# Altium PCB PCB Band Pass.PcbDoc
Units mm, origin at the board's own origin, x right, y up, seen from the top; angles counter-clockwise.
Board outline 60 x 40 mm, 2 copper layers (Top Layer, Bottom Layer); 53 components, 38 nets, 154 pads, 61 vias.
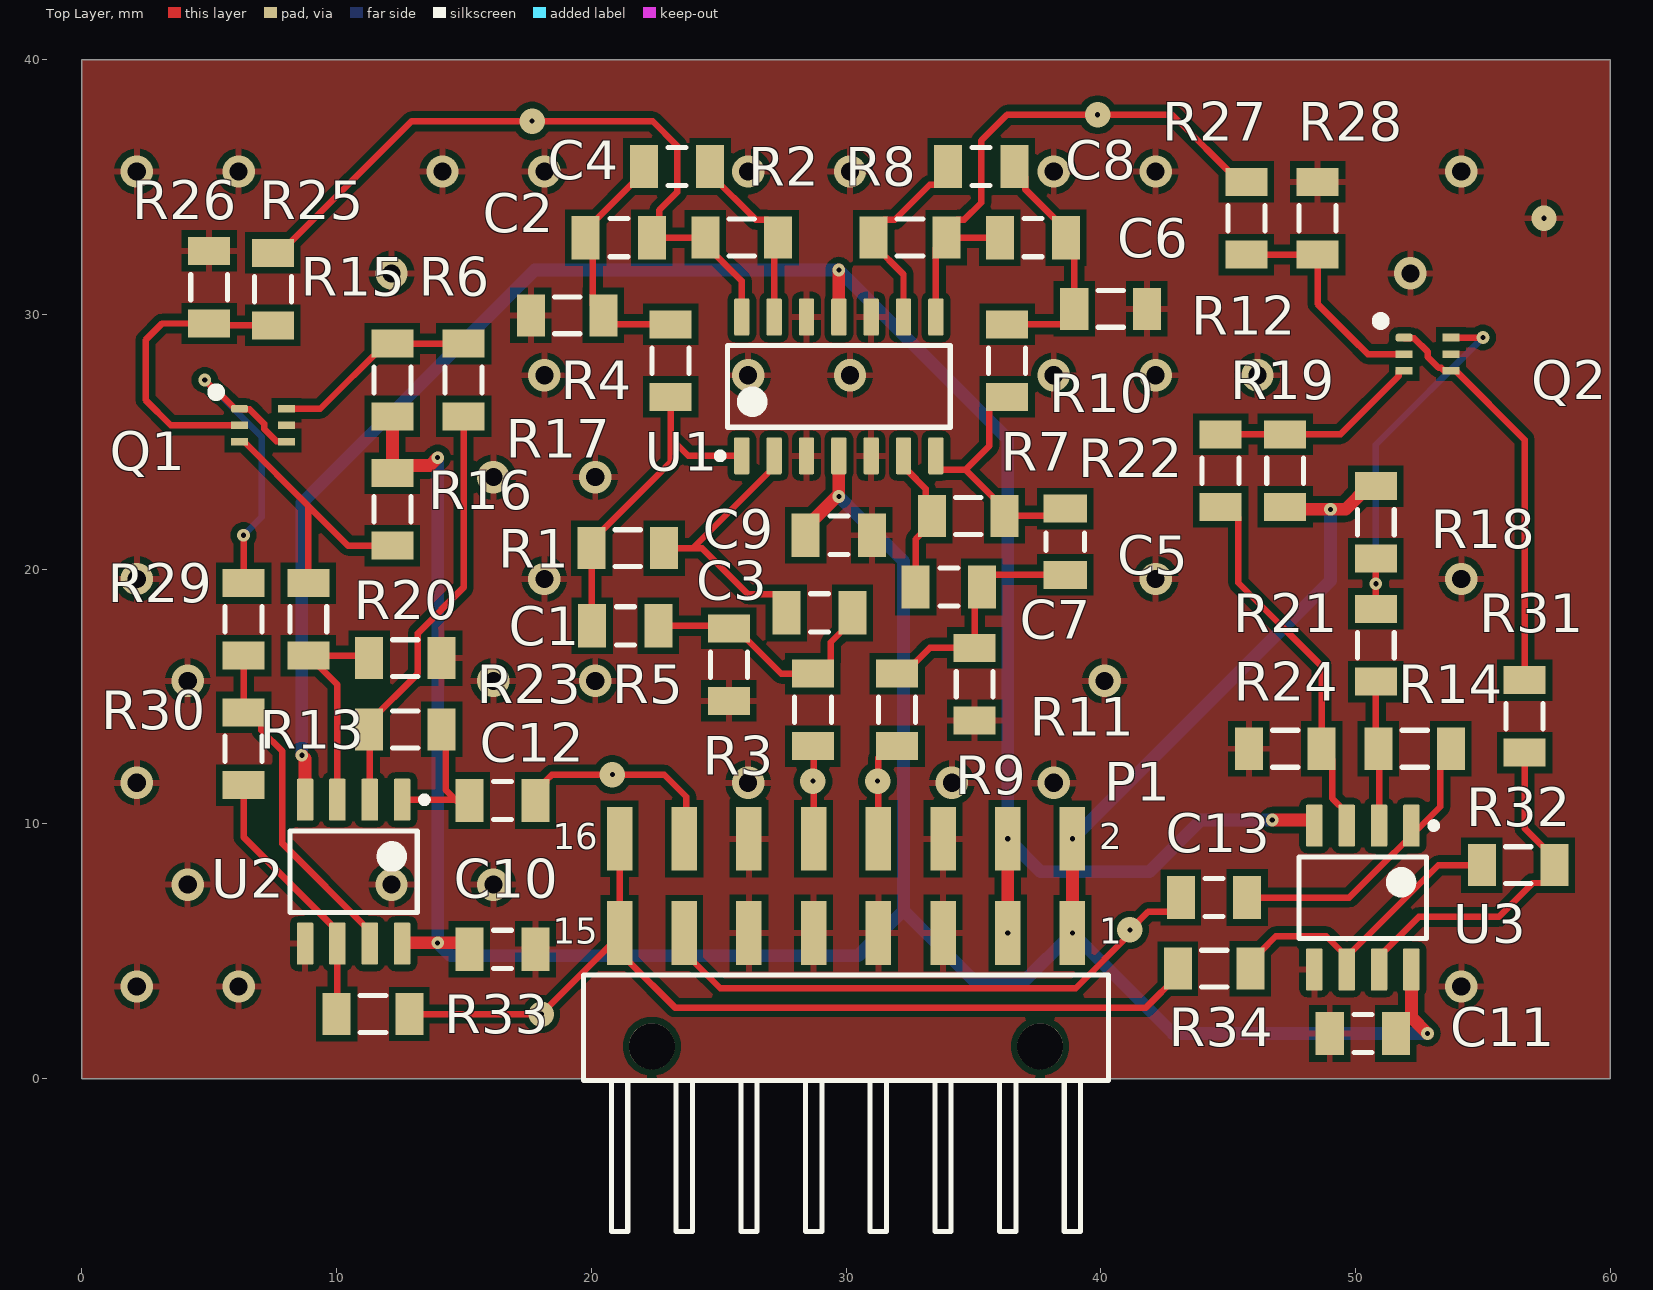
[diagram p0: Top Layer view]
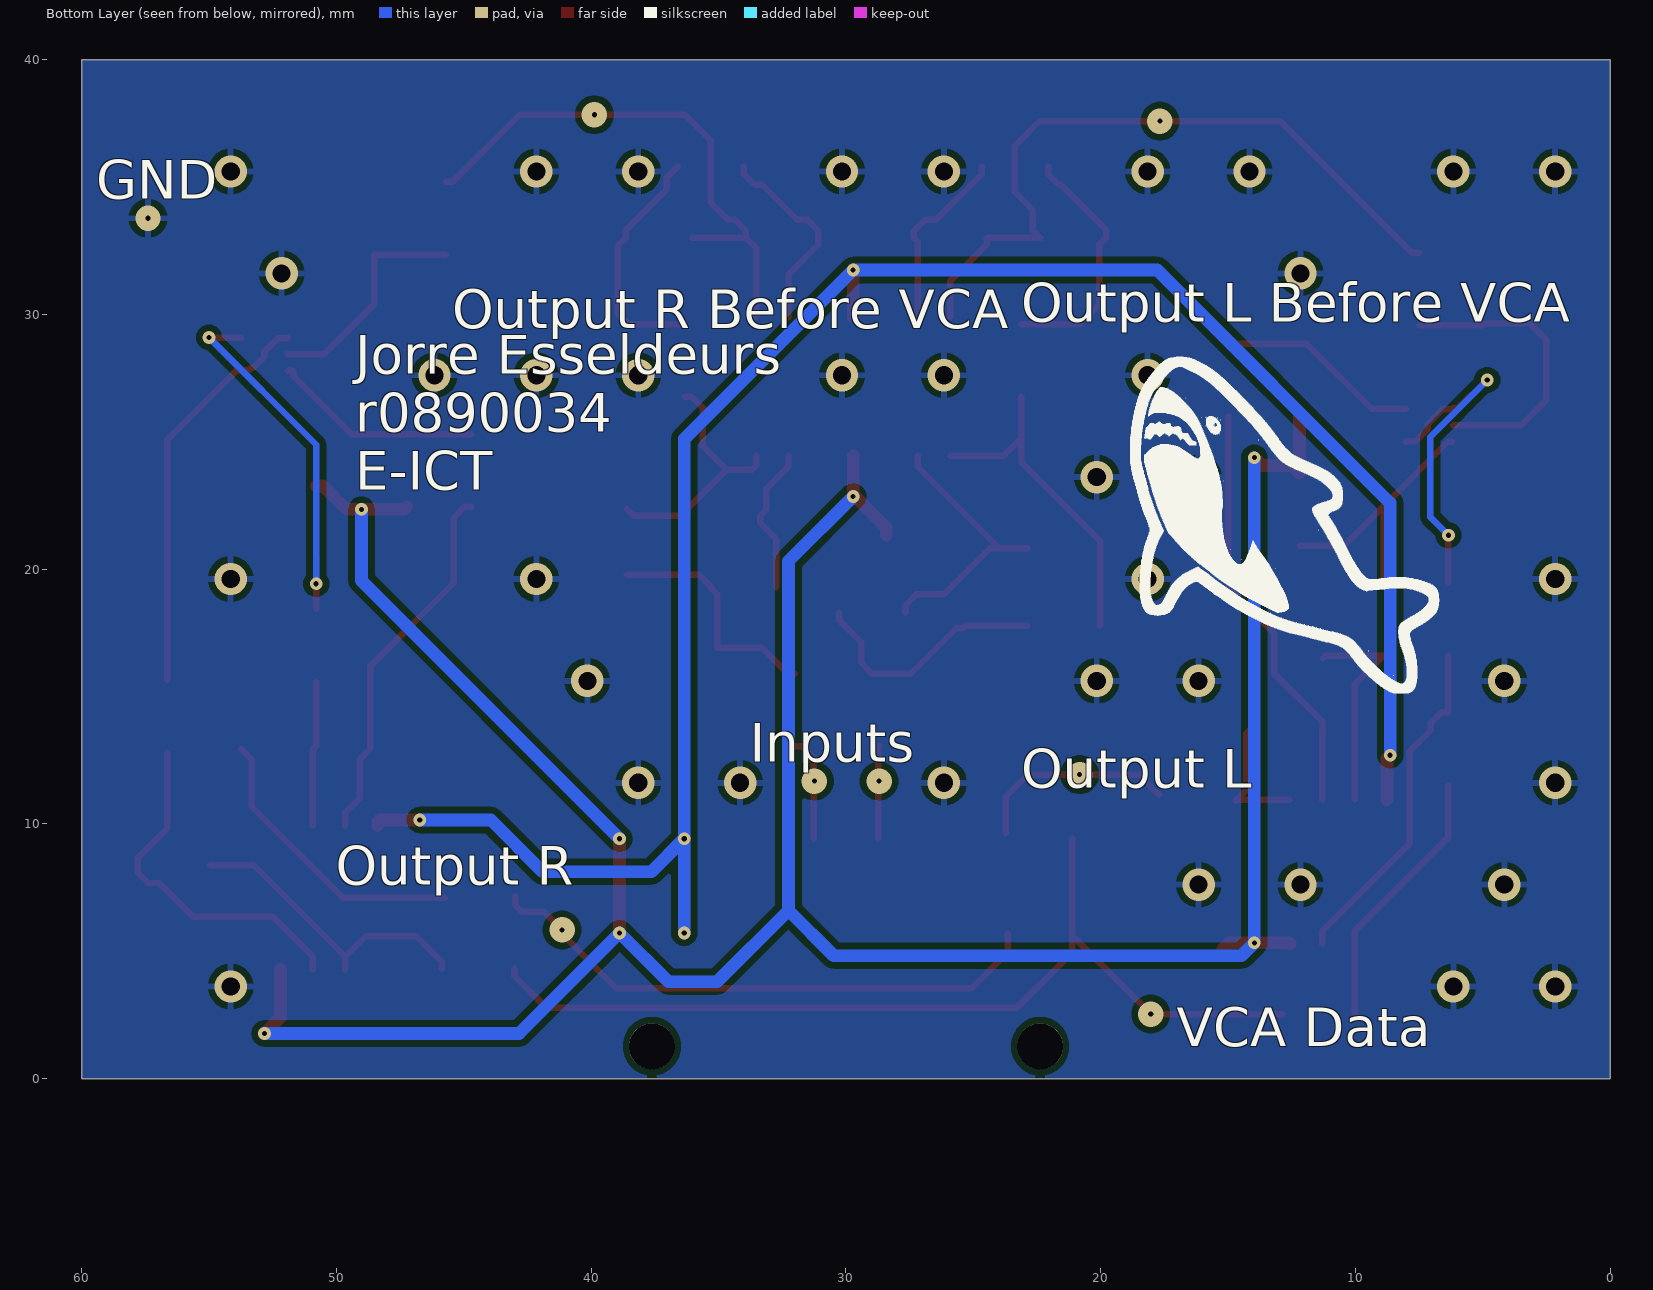
[diagram p1: Bottom Layer view, seen from below]

## Layer stack, top to bottom
Top Solder: solder mask 0.0102, Solder Resist, Dk 3.5
Top Layer: signal copper 0.0356
Dielectric 1: dielectric 0.32, FR-4, Dk 4.8
Bottom Layer: signal copper 0.0356
Bottom Solder: solder mask 0.0102, Solder Resist, Dk 3.5

## Board outline
0,0 0,40 60,40 60,0

## Design rules (kind name [scope] priority, off if disabled: settings)
Clearance [All] p1: gap=0.254 ignorepadtopadclearanceinfootprint=FALSE except(0: Arc-Hole Track-Hole SMDPad-Hole THPad-Hole Via-Hole Fill-Hole Poly-Hole Region-Hole Text-Hole)
PolygonConnect [All] p1: connectstyle=Relief reliefconductorwidth=0.254 reliefentries=4 polygonreliefangle="90 Angle" airgapwidth=0.254
RoutingVias [All] p1: holewidth=0.711 width=1.27 viastyle="Through Hole" minholewidth=0.711 minwidth=1.27 maxholewidth=0.711 maxwidth=1.27
SolderMaskExpansion [All] p1: expansion=0.102 istentingtop=FALSE
Width [All] p1: maxlimit=10 minlimit=0.254 preferedwidth=0.254 minimp=50.000000 maximp=50.000000 favimp=50.000000
30 further rules are at their usual default settings.

## Classes and differential pairs
component class SS1: C12 C13 Q1 Q2 R13 R14 R15 R16 R17 R18 R19 R20 R21 R22 R23 R24 R25 R26 R27 R28 R29 R30 R31 R32 R33 R34 U2 U3
component class "Schematic Band Pass": C1 C2 C3 C4 C5 C6 C7 C8 C9 C10 C11 P1 R1 R2 R3 R4 R5 R6 R7 R8 R9 R10 R11 R12 U1

## Components (designator, comment, footprint, x,y, rotation, side; value= is the part's Value field where it differs from the comment)
C1 "1206GC102KAT1A" AVX-1206-2_L 21.336,17.78 r180 top
C2 "1206GC102KAT1A" AVX-1206-2_L 21.082,33.02 r0 top
C3 "1206GC102KAT1A" AVX-1206-2_L 28.956,18.288 r180 top
C4 "1206GC102KAT1A" AVX-1206-2_L 23.368,35.814 r0 top
C5 "1206GC102KAT1A" AVX-1206-2_L 38.608,21.082 r90 top
C6 "1206GC102KAT1A" AVX-1206-2_L 37.338,33.02 r180 top
C7 "1206GC102KAT1A" AVX-1206-2_L 34.036,19.304 r180 top
C8 "1206GC102KAT1A" AVX-1206-2_L 35.306,35.814 r180 top
C9 "1206GC102KAT1A" AVX-1206-2_L 29.718,21.336 r180 top
C10 "1206GC102KAT1A" AVX-1206-2_L 16.51,5.08 r180 top
C11 "1206GC102KAT1A" AVX-1206-2_L 50.292,1.778 r0 top
C12 "1206GC102KAT1A" AVX-1206-2_L 16.51,10.922 r0 top
C13 "1206GC102KAT1A" AVX-1206-2_L 44.45,7.112 r180 top
P1 "610116249121" 610116249121 30,2 r0 top
Q1 "NSVT65011MW6T1G" NSVT65011MW6T1G 7.112,25.654 r0 top
Q2 "NSVT65011MW6T1G" NSVT65011MW6T1G 52.832,28.448 r0 top
R1 "ERJ-8GEY0R00V" RESC3216X70X50NL05T20 21.435,20.828 r180 top
R2 "ERJ-8GEY0R00V" RESC3216X70X50NL05T20 25.908,33.02 r180 top
R3 "ERJ-8GEY0R00V" RESC3216X70X50NL05T20 28.702,14.478 r90 top
R4 "ERJ-8GEY0R00V" RESC3216X70X50NL05T20 23.114,28.194 r90 top
R5 "ERJ-8GEY0R00V" RESC3216X70X50NL05T20 25.4,16.256 r90 top
R6 "ERJ-8GEY0R00V" RESC3216X70X50NL05T20 19.05,29.972 r0 top
R7 "ERJ-8GEY0R00V" RESC3216X70X50NL05T20 34.798,22.098 r0 top
R8 "ERJ-8GEY0R00V" RESC3216X70X50NL05T20 32.512,33.02 r0 top
R9 "ERJ-8GEY0R00V" RESC3216X70X50NL05T20 32.004,14.478 r90 top
R10 "ERJ-8GEY0R00V" RESC3216X70X50NL05T20 36.322,28.194 r90 top
R11 "ERJ-8GEY0R00V" RESC3216X70X50NL05T20 35.052,15.494 r90 top
R12 "ERJ-8GEY0R00V" RESC3216X70X50NL05T20 40.386,30.226 r180 top
R13 "ERJ-8GEY0R00V" RESC3216X70X50NL05T20 12.7,13.716 r0 top
R14 "ERJ-8GEY0R00V" RESC3216X70X50NL05T20 52.324,12.954 r0 top
R15 "ERJ-8GEY0R00V" RESC3216X70X50NL05T20 12.192,27.432 r270 top
R16 "ERJ-8GEY0R00V" RESC3216X70X50NL05T20 12.192,22.352 r90 top
R17 "ERJ-8GEY0R00V" RESC3216X70X50NL05T20 14.986,27.432 r270 top
R18 "ERJ-8GEY0R00V" RESC3216X70X50NL05T20 50.8,21.844 r90 top
R19 "ERJ-8GEY0R00V" RESC3216X70X50NL05T20 47.244,23.876 r270 top
R20 "ERJ-8GEY0R00V" RESC3216X70X50NL05T20 8.89,18.034 r270 top
R21 "ERJ-8GEY0R00V" RESC3216X70X50NL05T20 50.8,17.018 r270 top
R22 "ERJ-8GEY0R00V" RESC3216X70X50NL05T20 44.704,23.876 r270 top
R23 "ERJ-8GEY0R00V" RESC3216X70X50NL05T20 12.7,16.51 r180 top
R24 "ERJ-8GEY0R00V" RESC3216X70X50NL05T20 47.244,12.954 r0 top
R25 "ERJ-8GEY0R00V" RESC3216X70X50NL05T20 7.5,31 r90 top
R26 "ERJ-8GEY0R00V" RESC3216X70X50NL05T20 5,31.075 r270 top
R27 "ERJ-8GEY0R00V" RESC3216X70X50NL05T20 45.72,33.782 r90 top
R28 "ERJ-8GEY0R00V" RESC3216X70X50NL05T20 48.514,33.782 r270 top
R29 "ERJ-8GEY0R00V" RESC3216X70X50NL05T20 6.35,18.034 r90 top
R30 "ERJ-8GEY0R00V" RESC3216X70X50NL05T20 6.35,12.954 r90 top
R31 "ERJ-8GEY0R00V" RESC3216X70X50NL05T20 56.642,14.224 r90 top
R32 "ERJ-8GEY0R00V" RESC3216X70X50NL05T20 56.388,8.382 r0 top
R33 "ERJ-8GEY0R00V" RESC3216X70X50NL05T20 11.43,2.54 r180 top
R34 "ERJ-8GEY0R00V" RESC3216X70X50NL05T20 44.45,4.318 r0 top
U1 "TL074CDR" D0014A_N 29.718,27.178 r90 top
U2 "TL072CDR" D0008A_M 10.668,8.128 r270 top
U3 "TL072CDR" D0008A_M 50.292,7.112 r270 top

## Footprints (in the part's own frame and the unit in brackets; to place one, negate y for a bottom-side part, rotate by r counter-clockwise, add the part's x,y. Pads: shape width x height; smd on the part's side, far side on the other; paste and mask are expansions set on the pad)
610116249121 [mm] "Pin Header, pitch 2.54 mm, SMD, Angled, dual row, 16p"
  rect 1x2.5 smd: 1(8.89,3.72) 2(8.89,7.42) 3(6.35,3.72) 4(6.35,7.42) 5(3.81,3.72) 6(3.81,7.42) 7(1.27,3.72) 8(1.27,7.42) 9(-1.27,3.72) 10(-1.27,7.42) 11(-3.81,3.72) 12(-3.81,7.42) 13(-6.35,3.72) 14(-6.35,7.42) 15(-8.89,3.72) 16(-8.89,7.42)
  round 1.8 hole 1.8 unplated: MH1(7.62,-0.73) MH2(-7.62,-0.73)
  silkscreen extent -10.31,-8 10.31,2.07, body extent -10.16,-8 10.16,8.16, height 5.1
AVX-1206-2_L [mm] "SMD, 2-Leads, Body 3.4x1.8mm, IPC High Density"
  rect 1.1x1.7 smd: 1(-1.3,0) 2(1.3,0)
  silkscreen extent -0.35,-0.75 0.35,0.75, body extent -1.7,-0.9 1.7,0.9, height 1.52
D0008A_M [mm] "SOIC, 8-Leads, Body 5x4mm, Pitch 1.27mm, IPC Low Density"
  rrect15% 1.65x0.65 smd: 1(-2.825,1.905) 2(-2.825,0.635) 3(-2.825,-0.635) 4(-2.825,-1.905) 5(2.825,-1.905) 6(2.825,-0.635) 7(2.825,0.635) 8(2.825,1.905)
  silkscreen extent -2.95,-2.5 1.6,2.91, body extent -3,-2.45 3,2.45, height 1.63
D0014A_N [mm] "SOIC, 14-Leads, Body 8.75x4mm, Pitch 1.27mm, IPC Medium Density"
  rrect17% 1.45x0.6 smd: 1(-2.725,3.81) 2(-2.725,2.54) 3(-2.725,1.27) 4(-2.725,0) 5(-2.725,-1.27) 6(-2.725,-2.54) 7(-2.725,-3.81) 8(2.725,-3.81) 9(2.725,-2.54) 10(2.725,-1.27) 11(2.725,0) 12(2.725,1.27) 13(2.725,2.54) 14(2.725,3.81)
  silkscreen extent -2.85,-4.38 1.6,4.78, body extent -3.02,-4.32 3.02,4.32, height 1.59
NSVT65011MW6T1G [mm]
  rrect50% 0.66x0.3 smd: 1(-0.92,0.65)
  rect 0.66x0.3 smd: 2(-0.92,0) 3(-0.92,-0.65) 4(0.92,-0.65) 5(0.92,0) 6(0.92,0.65)
  silkscreen extent -1.94,1.2 -1.74,1.4, body extent -1.05,-1 1.05,1, height 1
RESC3216X70X50NL05T20 [mm] "Chip Resistor, 2-Leads, Body 3.20x1.60mm, IPC Medium Density"
  rect 1.1x1.65 smd: 1(-1.425,0) 2(1.425,0)
  silkscreen extent -0.5,-0.72 0.5,0.72, body extent -1.63,-0.82 1.62,0.82, height 0.7

## Part data
C1 C2 C3 C4 C5 C6 C7 C8 C9 C10 C11 C12 C13: library part CMP-2000-05468-1, "Chip Capacitor, 1 nF, +/- 10%, -55 to 125 degC, 1206 (3216 Metric), RoHS, Tape and Reel", Capacitance=0.001uF, Case Size/Dimension=1206, Dielectric=X7R, Manufacturer=AVX, Package Description="2-Pin SMD, Body 3.4 x 1.8 mm", Rated Voltage=2000V, Tolerance=10%, Tolerance (%)=±10%, Datasheet URL=https://datasheet.ciiva.com/11787/0900766b80ed4c37-11787781.pdf, Datasheet Version=11/2010, Manufacturer URL=http://www.avx.com/, Mounting Technology=SurfaceMount, Package Reference=1206, PartNumber=1206GC102KAT1A, Voltage Rating DC=2000V
P1: library part CMP-1502-01151-2, Color=Black, Contact Resistance=20mΩ, Current Rating=3A, Operating Supply Voltage=250V, Connector Type="Male Pin", Contact Mating Length=5.9944mm, Contact Plating=Gold, Gender=Male, Lead Pitch=2.54mm, Mount="Surface Mount", NexarPartId=52645099, Number Of Contacts=16, Number of Pins=16, Number of Positions=16, Number of Rows=2, Packaging="Tape and Reel", Pitch=2.54mm, REACH SVHC=Unknown, RoHS=Compliant, Row Spacing=2.54mm, Termination=Solder
R1 R2 R3 R4 R5 R6 R7 R8 R9 R10 R11 R12 R13 R14 R15 R16 R17 R18 R19 R20 R21 R22 R23 R24 R25 R26 R27 R28 R29 R30 R31 R32 R33 R34: library part CMP-2003-00541-1, Manufacturer=Panasonic, Part Number=ERJ-8GEY0R00V
U1: library part CMP-0017-00003-2, "Quad Low-Noise JFET-Input General-Purpose Operational Amplifier, 7 to 36 V, 0 to 70 degC, 14-pin SOIC (D14), Green (RoHS & no Sb/Br)", Manufacturer="Texas Instruments", Rating=Military, Total Supply Voltage(Max)(+5V is 5, +/-5V is 10)=36, Total Supply Voltage(Min)(+5V is 5, +/-5V is 10)=7, CMRR(Min)(dB)=70, Code_JEDEC=MS-012, ComponentLink1Description="Manufacturer URL", ComponentLink1URL=http://www.ti.com/, ComponentLink2Description=Datasheet, ComponentLink2URL=http://www.ti.com/lit/ds/symlink/tl074.pdf, ComponentLink3Description="Package Specification", ComponentLink3URL=http://www.ti.com/lit/ml/mpds177g/mpds177g.pdf, DatasheetVersion=SLOS080J, Eco-Plan="Green (RoHS & no Sb/Br)", GBW(Typ)(MHz)=3, IIB(Max)(pA)=200, Iq per channel(Max)(mA)=2.5, Mounting Technology="Surface Mount", Number of Channels=4, Offset Drift(Typ)(uV/C)=18, PackageDescription="14-Pin Plastic Small Outline, Body 8.65 x 3.90 mm, Pitch 1.27 mm", PackageReference=D0014A, PackageVersion="4040047-5/M, 06/2011", PartNumber=TL074CDR, Slew Rate(Typ)(V/us)=13, Sub Family="General Purpose Amplifier, High Supply Voltage Amplifier (>=30V)", Vio (25C)(Max)(mV)=10, Vn at 1kHz(Typ)(nV/rtHz)=18
U2 U3: library part CMP-0017-00628-2, "Dual Low-Noise JFET-Input General-Purpose Operational Amplifier, 7 to 36 V, 0 to 70 degC, 8-pin SOIC (D8), Green (RoHS & no Sb/Br)", Manufacturer="Texas Instruments", Rating=Catalog, Total Supply Voltage(Max)(+5V is 5, +/-5V is 10)=36, Total Supply Voltage(Min)(+5V is 5, +/-5V is 10)=7, CMRR(Min)(dB)=70, Code_JEDEC=MS-012, ComponentLink1Description="Manufacturer URL", ComponentLink1URL=http://www.ti.com/, ComponentLink2Description=Datasheet, ComponentLink2URL=http://www.ti.com/lit/ds/symlink/tl072.pdf, ComponentLink3Description="Package Specification", ComponentLink3URL=http://www.ti.com/litv/pdf/msoi002j, DatasheetVersion=SLOS080J, Eco-Plan="Green (RoHS & no Sb/Br)", GBW(Typ)(MHz)=3, IIB(Max)(pA)=200, Iq per channel(Max)(mA)=2.5, Mounting Technology="Surface Mount", Number of Channels=2, Offset Drift(Typ)(uV/C)=18, PackageDescription="8-Pin Plastic Small Outline, Body 4.9 x 3.9 mm, Pitch 1.27 mm", PackageReference=D0008A, PackageVersion="4040047-3/M, 06/2011", PartNumber=TL072CDR, Slew Rate(Typ)(V/us)=13, Sub Family="General Purpose Amplifier, High Supply Voltage Amplifier (>=30V)", Vio (25C)(Max)(mV)=10, Vn at 1kHz(Typ)(nV/rtHz)=18

## Via types
v1: diameter 1.27, hole 0.711, Top Layer to Bottom Layer, tented both sides, 37 vias
v2: diameter 0.5, hole 0.2, Top Layer to Bottom Layer, tented both sides, 16 vias
v3: diameter 1, hole 0.2, Top Layer to Bottom Layer, tented top, 8 vias

## Nets (pads, with @x,y where several pads share a name; then routed paths per layer and width w, separated by ;. In a path a pad name is that pad's centre, name@x,y a point inside that pad or via, vN(x,y) a via of type N, cw(c..) or ccw(c..) an arc to the next point about the centre after c; other vN are vias at no path point)
"AudioL IN": C2.2 R2.2 R25.2 U1.14 | length 28.2
  Top Layer w0.254: R25.2 7.775,32.425 12.942,37.592 22.408,37.592 23.368,36.632 23.368,34.798 22.672,34.102 22.672,33.31 C2.2 R2.2 24.483,32.745 25.908,31.32 U1.14
  other v3: 17.675,37.592
"AudioR IN": C6.2 R8.2 R27.2 U1.8 | length 21.9
  Top Layer w0.254: U1.8 33.528,32.611 R8.2 ; C6.2 R8.2 ; R27.2 45.445,35.207 42.806,37.846 36.322,37.846 35.306,36.83 35.306,34.389 34.635,33.718 34.36,33.718 33.937,33.295 R8.2
  other v3: 39.878,37.846
GND: C9.1 C10.1 C11.1 P1.5 P1.6 P1.7 P1.9 P1.11 P1.12 Q1.5 Q2.5 R5.1 R6.1 R11.1 R12.1 R23.1 R24.1 R26.1 R28.1 U1.3 U1.5 U1.10 U1.12 U2.5 U3.5
  other v1: 2.156,3.618 6.156,3.618 54.156,3.618 4.156,7.618 12.156,7.618 16.156,7.618 2.156,11.618 26.156,11.618 34.156,11.618 38.156,11.618 4.156,15.618 16.156,15.618 20.156,15.618 40.156,15.618 2.156,19.618 18.156,19.618 42.156,19.618 54.156,19.618 16.156,23.618 20.156,23.618 18.156,27.618 26.156,27.618 30.156,27.618 38.156,27.618 42.156,27.618 46.156,27.618 12.156,31.618 52.156,31.618 2.156,35.618 6.156,35.618 14.156,35.618 18.156,35.618 26.156,35.618 30.156,35.618 38.156,35.618 42.156,35.618 54.156,35.618
  other v3: 57.404,33.782
InputL: P1.10 R3.1 | length 3.6
  Top Layer w0.254: R3.1 28.73,13.025 P1.10
  other v3: 28.702,11.684
InputR: P1.8 R9.1 | length 4.1
  Top Layer w0.254: P1.8 31.27,12.594 31.729,13.053 R9.1
  other v3: 31.242,11.684
NetC1_1: C1.1 C3.1 R3.2 R5.2 | length 9.8
  Top Layer w0.254: C1.1@22.89,17.78 25.301,17.78 R5.2 25.675,17.681 27.453,15.903 R3.2 28.977,15.903 29.4,16.326 29.4,17.132 30.256,17.988 C3.1
NetC1_2: C1.2 R1.2 R4.1 U1.1 | length 13.4
  Top Layer w0.254: C1.2 20.01,17.806 R1.2 20.01,21.103 23.114,24.207 23.114,25.146 ; R4.1 23.114,25.146 ; U1.1 23.807,24.453 23.114,25.146
NetC2_1: C2.1 C4.1 R4.2 R6.2 | length 9.9
  Top Layer w0.254: C4.1 22.068,35.514 21.645,35.091 21.553,35.091 19.782,33.32 C2.1 20.066,32.736 20.066,30.381 20.828,29.619 R4.2
NetC3_2: C3.2 R1.1 U1.2 | length 11
  Top Layer w0.254: R1.1 23.978,20.828 ; U1.2 27.178,24.028 23.978,20.828 ; C3.2 27.656,18.588 27.233,19.011 26.166,19.011 24.349,20.828 23.978,20.828
NetC4_2: C4.2 R2.1 U1.13 | length 7.3
  Top Layer w0.254: C4.2 24.668,35.514 26.464,33.718 26.91,33.718 27.333,33.295 R2.1 27.178,32.865 U1.13
NetC5_1: C5.1 C7.1 R9.2 R11.2 | length 9.5
  Top Layer w0.254: R9.2 32.279,15.903 33.295,16.919 R11.2 35.052,19.02 C7.1 35.336,19.359 35.759,19.782 C5.1
NetC5_2: C5.2 R7.2 R10.1 U1.7 | length 10.3
  Top Layer w0.254: U1.7 33.528,24.079 33.701,23.906 34.69,23.906 ; R10.1 36.047,26.769 35.624,26.346 35.624,24.84 34.69,23.906 ; C5.2 38.324,22.098 R7.2 36.223,22.373 34.69,23.906
NetC6_1: C6.1 C8.1 R10.2 R12.2 | length 9.6
  Top Layer w0.254: R10.2 38.538,29.619 38.961,30.042 R12.2 38.961,32.697 C6.1 38.638,33.32 37.029,34.929 37.029,35.391 C8.1
NetC7_2: C7.2 R7.1 U1.6 | length 5.9
  Top Layer w0.254: U1.6 32.258,24.028 32.431,23.855 33.131,23.155 33.131,22.34 R7.1 33.373,21.823 32.736,21.186 C7.2
NetC8_2: C8.2 R8.1 U1.9 | length 8
  Top Layer w0.254: U1.9 32.258,31.574 31.087,32.745 31.087,33.295 31.51,33.718 31.91,33.718 33.291,35.099 33.583,35.099 34.006,35.522 C8.2
NetC12_1: C12.1 R13.2 U2.1 | length 5.1
  Top Layer w0.254: U2.1 C12.1@14.671,10.953 ; R13.2 14.279,13.562 14.279,11.345 C12.1@14.671,10.953 ; C12.1@14.702,10.922 C12.1@14.671,10.953
NetC13_1: C13.1 R14.2 U3.1 | length 11.5
  Top Layer w0.254: C13.1 49.762,7.112 53.326,10.676 53.326,12.531 R14.2
NetQ1_1: Q1.1 Q1.4 R29.2 | length 13.5
  Top Layer w0.254: v2(4.826,27.432) 5.419,26.839 5.477,26.839 5.989,26.327 6.169,26.327 6.215,26.281 6.584,26.281 7.16,25.705 7.16,25.507 7.64,25.027 8.009,25.027 Q1.4 ; R29.2 v2(6.35,21.336)
  Bottom Layer w0.254: v2(4.826,27.432) 7.064,25.194 7.064,22.05 v2(6.35,21.336)
NetQ1_2: Q1.2 R25.1 R26.2 | length 11.7
  Top Layer w0.254: R26.2@5,29.575 R25.1 ; R26.2 4.575,29.65 3.15,29.65 2.5,29 2.5,26.649 3.495,25.654 Q1.2@6.157,25.654
NetQ1_3: Q1.3 R16.1 R20.1 | length 10.7
  Top Layer w0.254: Q1.3 6.372,25.004 8.89,22.486 ; R20.1 8.89,22.486 ; R16.1 10.449,20.927 8.89,22.486
NetQ1_6: Q1.6 R15.1 R17.1 | length 8
  Top Layer w0.254: Q1.6 9.364,26.304 11.917,28.857 R15.1 R17.1
NetQ2_1: Q2.1 Q2.4 R31.2 | length 15.9
  Top Layer w0.254: Q2.1 51.935,29.075 52.304,29.075 52.832,28.547 52.832,28.349 53.264,27.917 53.363,27.917 53.459,27.821 53.909,27.821 56.642,25.088 R31.2
NetQ2_2: Q2.2 R27.1 R28.2 | length 8.9
  Top Layer w0.254: R27.1 R28.2 48.514,30.419 49.85,29.083 50.485,28.448 Q2.2
NetQ2_3: Q2.3 R19.1 R22.1 | length 8.3
  Top Layer w0.254: R22.1 R19.1 49.415,25.301 51.709,27.595 51.709,27.775 51.732,27.798 Q2.3
NetQ2_6: Q2.6 R18.1 R21.1 | length 14.6
  Top Layer w0.254: R21.1 v2(50.8,19.431) R18.1 ; Q2.6 v2(55.006,29.098)
  Bottom Layer w0.254: v2(50.8,19.431) 50.8,24.892 v2(55.006,29.098)
NetR13_1: R13.1 R17.2 U2.2 | length 16.6
  Top Layer w0.254: U2.2 11.303,13.688 R13.1 11.275,13.991 13.194,15.91 13.194,17.493 14.986,19.285 R17.2
NetR14_1: R14.1 R21.2 U3.2 | length 5.7
  Top Layer w0.254: R21.2 50.8,13.053 R14.1 50.927,12.926 U3.2
NetR20_2: R20.2 R23.2 U2.3 | length 8.6
  Top Layer w0.254: U2.3 10.033,15.466 R20.2 11.176,16.609 R23.2
NetR22_2: R22.2 R24.2 U3.3 | length 14.7
  Top Layer w0.254: R22.2 44.979,22.451 45.402,22.028 45.402,19.473 48.669,16.206 R24.2 49.092,12.531 49.092,11.002 49.657,10.437 U3.3
NetR29_1: R29.1 R30.2 U2.7 | length 13.5
  Top Layer w0.254: R29.1 R30.2 6.625,14.379 7.048,13.956 7.048,13.681 7.874,12.855 7.874,9.232 11.303,5.803 U2.7
NetR30_1: R30.1 R33.2 U2.6 | length 10.5
  Top Layer w0.254: R30.1 6.35,9.486 10.033,5.803 U2.6 10.033,2.568 R33.2
NetR31_1: R31.1 R32.2 U3.7 | length 13.9
  Top Layer w0.254: U3.7 50.927,4.787 52.49,6.35 55.626,6.35 56.96,7.684 57.39,7.684 57.813,8.107 R32.2 57.813,8.657 56.642,9.828 R31.1
NetR32_1: R32.1 R34.2 U3.6 | length 12.1
  Top Layer w0.254: R34.2 45.875,4.593 46.298,5.016 46.87,5.588 48.856,5.588 U3.6@49.657,4.787 ; U3.6 U3.6@49.657,4.787 ; R32.1 53.252,8.382 U3.6@49.657,4.787
OutputL: C12.2 P1.14 | length 8.2
  Top Layer w0.254: C12.2@17.693,11.176 17.764,11.176 18.233,11.645 18.233,11.716 18.455,11.938 20.32,11.938 v3(20.828,11.938) 22.86,11.938 23.727,11.071 P1.14@23.727,9.652
OutputR: C13.2 P1.13 | length 22.4
  Top Layer w0.254: P1.13 23.65,4.97 25.064,3.556 39.015,3.556 v3@41.224,5.766 ; v3(41.148,5.842) 41.86,6.554 42.727,6.554 42.985,6.812 C13.2@42.985,7.171
"VCA Data": P1.15 P1.16 R33.1 R34.1 | length 37.6
  Top Layer w0.254: R33.1 v3(18.034,2.54) P1.15@21.11,5.616 ; P1.16 P1.15 P1.15@21.11,5.616 ; R34.1 43.025,4.043 41.776,2.794 23.286,2.794 21.483,4.597 21.11,4.97 P1.15@21.11,5.616
VCC: C9.2 C10.2 C11.2 P1.1 P1.2 R15.2 R16.2 R18.2 R19.2 U1.4 U2.8 U3.8 | length 118
  Top Layer w0.5: R15.2 R16.2 12.492,24.077 13.663,24.077 v2(13.97,24.384) ; U2.8 12.604,5.334 v2(13.97,5.334) 14.956,5.334 C10.2 ; C9.2 28.418,21.636 29.718,22.936 U1.4 ; v2(38.89,5.72) v2(38.89,9.42) ; R19.2 47.343,22.352 v2(49.022,22.352) 49.608,22.352 50.525,23.269 R18.2 ; U3.8 52.197,2.413 v2(52.832,1.778)
  Bottom Layer w0.5: v2(13.97,24.384) v2(13.97,5.334) 14.478,4.826 30.48,4.826 32.258,6.604 ; v2(29.718,22.86) 32.258,20.32 32.258,6.604 ; v2(38.89,9.42) 49.022,19.552 v2(49.022,22.352) ; v2(52.832,1.778) 42.832,1.778 v2(38.89,5.72) 36.98,3.81 35.052,3.81 32.258,6.604
VEE: P1.3 P1.4 U1.11 U2.4 U3.4 | length 84.5
  Top Layer w0.5: v2(8.636,12.7) 8.763,12.573 U2.4 ; U1.11 v2(29.718,31.75) ; v2(36.35,5.72) v2(36.35,9.42) ; v2(46.736,10.16) 48.312,10.16 48.387,10.085 U3.4
  Bottom Layer w0.5: v2(8.636,12.7) 8.636,22.606 17.78,31.75 v2(29.718,31.75) 36.35,25.118 v2(36.35,9.42) ; v2(36.35,5.72) v2(36.35,9.42) ; v2(46.736,10.16) 43.942,10.16 41.91,8.128 37.642,8.128 v2(36.35,9.42)
pads on no net: P1.MH1 P1.MH2

## Polygon pours and split planes (outlines as drawn)
GND on Bottom Layer "NONET_L-01_P-001" (solid, remove dead copper, pour order 1): 0,0 60,0 60,40 0,40
GND on Top Layer "NONET_L-01_P-001" (solid, remove dead copper, pour order 2): 0,0 60,0 60,40 0,40

## Silkscreen, mask and mechanical layers (free items; w line width, h text height)
Bottom Overlay:
  drawing of 23 lines, arcs and shapes, not listed
  text "GND" at 59.436,34.544 h1.52
  text "Output L Before VCA" at 23.114,29.718 h1.52
  text "Output R Before VCA" at 45.466,29.464 h1.52
  text "Jorre Esseldeurs / r0890034 / E-ICT" at 49.276,23.114 h1.52
  text "Inputs" at 33.782,12.446 h1.52
  text "Output L" at 23.114,11.43 h1.52
  text "Output R" at 50.038,7.62 h1.52
  text "VCA Data" at 17.018,1.27 h1.52
Mechanical 1:
  the board outline again, w0.25

## Text inside footprints (layer, text, board x,y; h text height)
P1: Top Overlay "1" at 39.95,5.3 h1.02; Top Overlay "2" at 39.95,9 h1.02; Top Overlay "16" at 18.49,9 h1.02; Top Overlay "15" at 18.49,5.3 h1.02